# Altium PCB PCB_UI.PcbDoc
Units mil, origin at the board's own origin, x right, y up, seen from the top; angles counter-clockwise.
Board outline 4000 x 2500 mil, 2 copper layers (Top Layer, Bottom Layer); 55 components, 74 nets, 218 pads, 32 vias.
Unrouted connection lines stored in the file: 24.
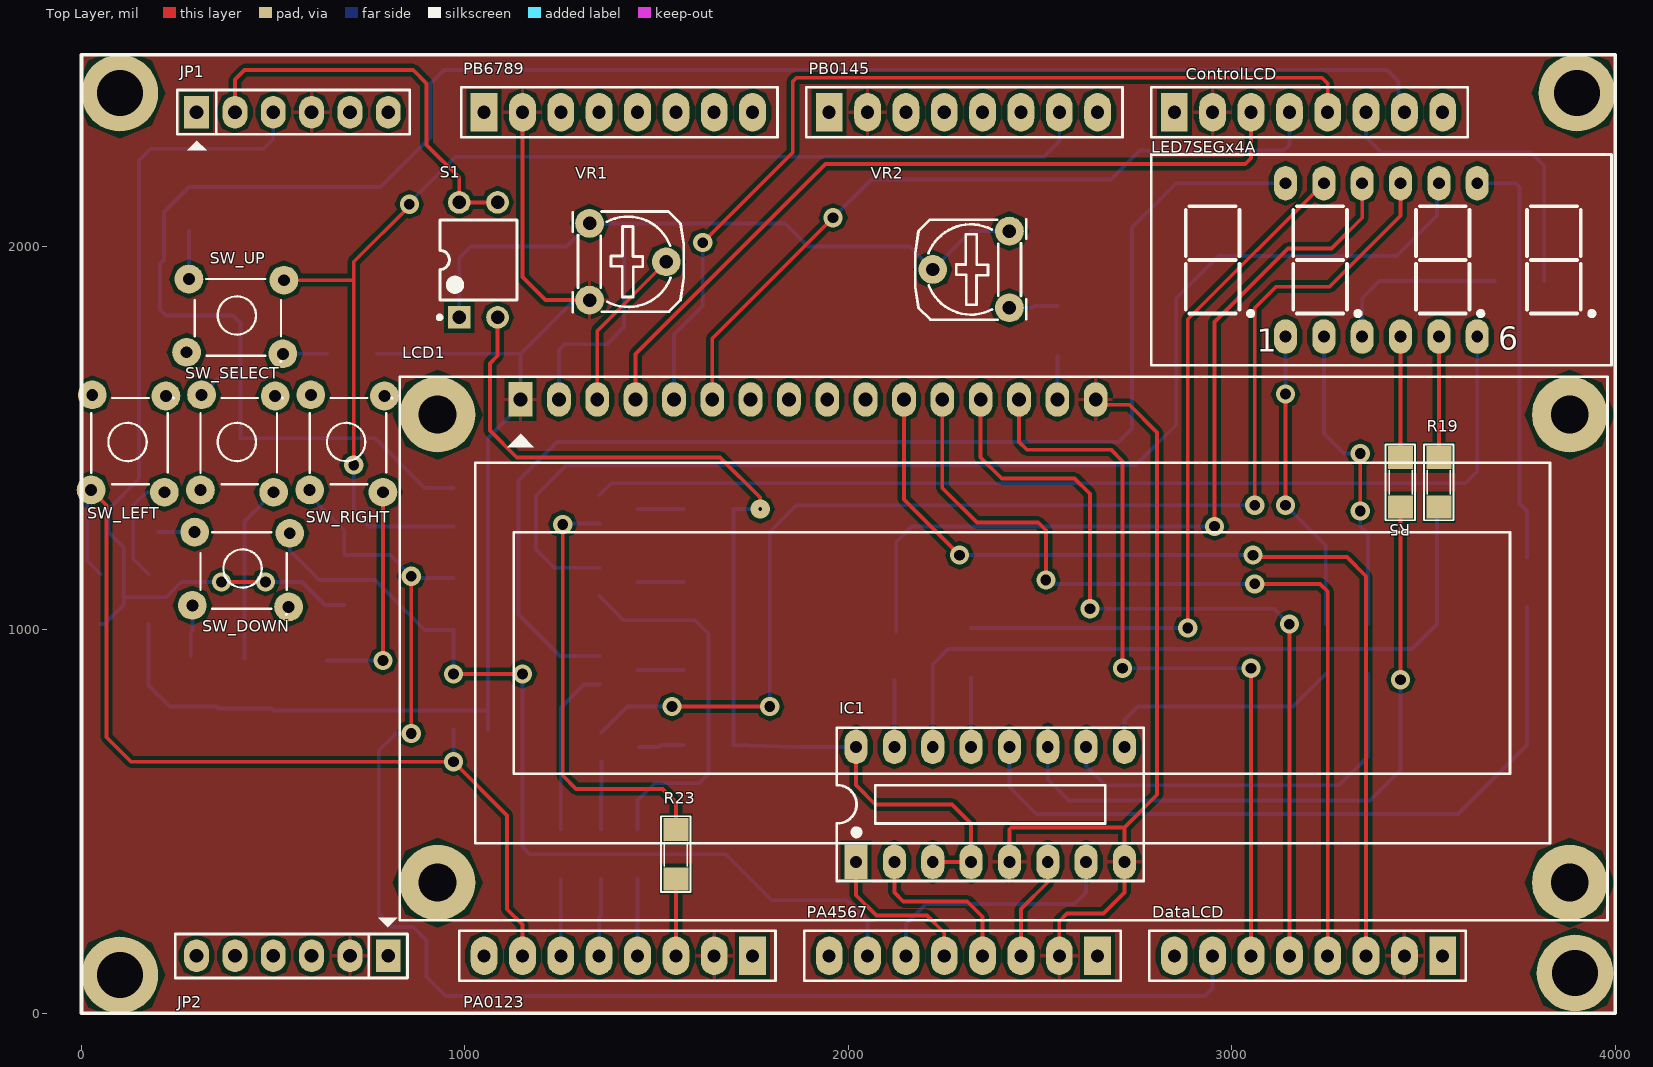
[diagram p0: Top Layer view]
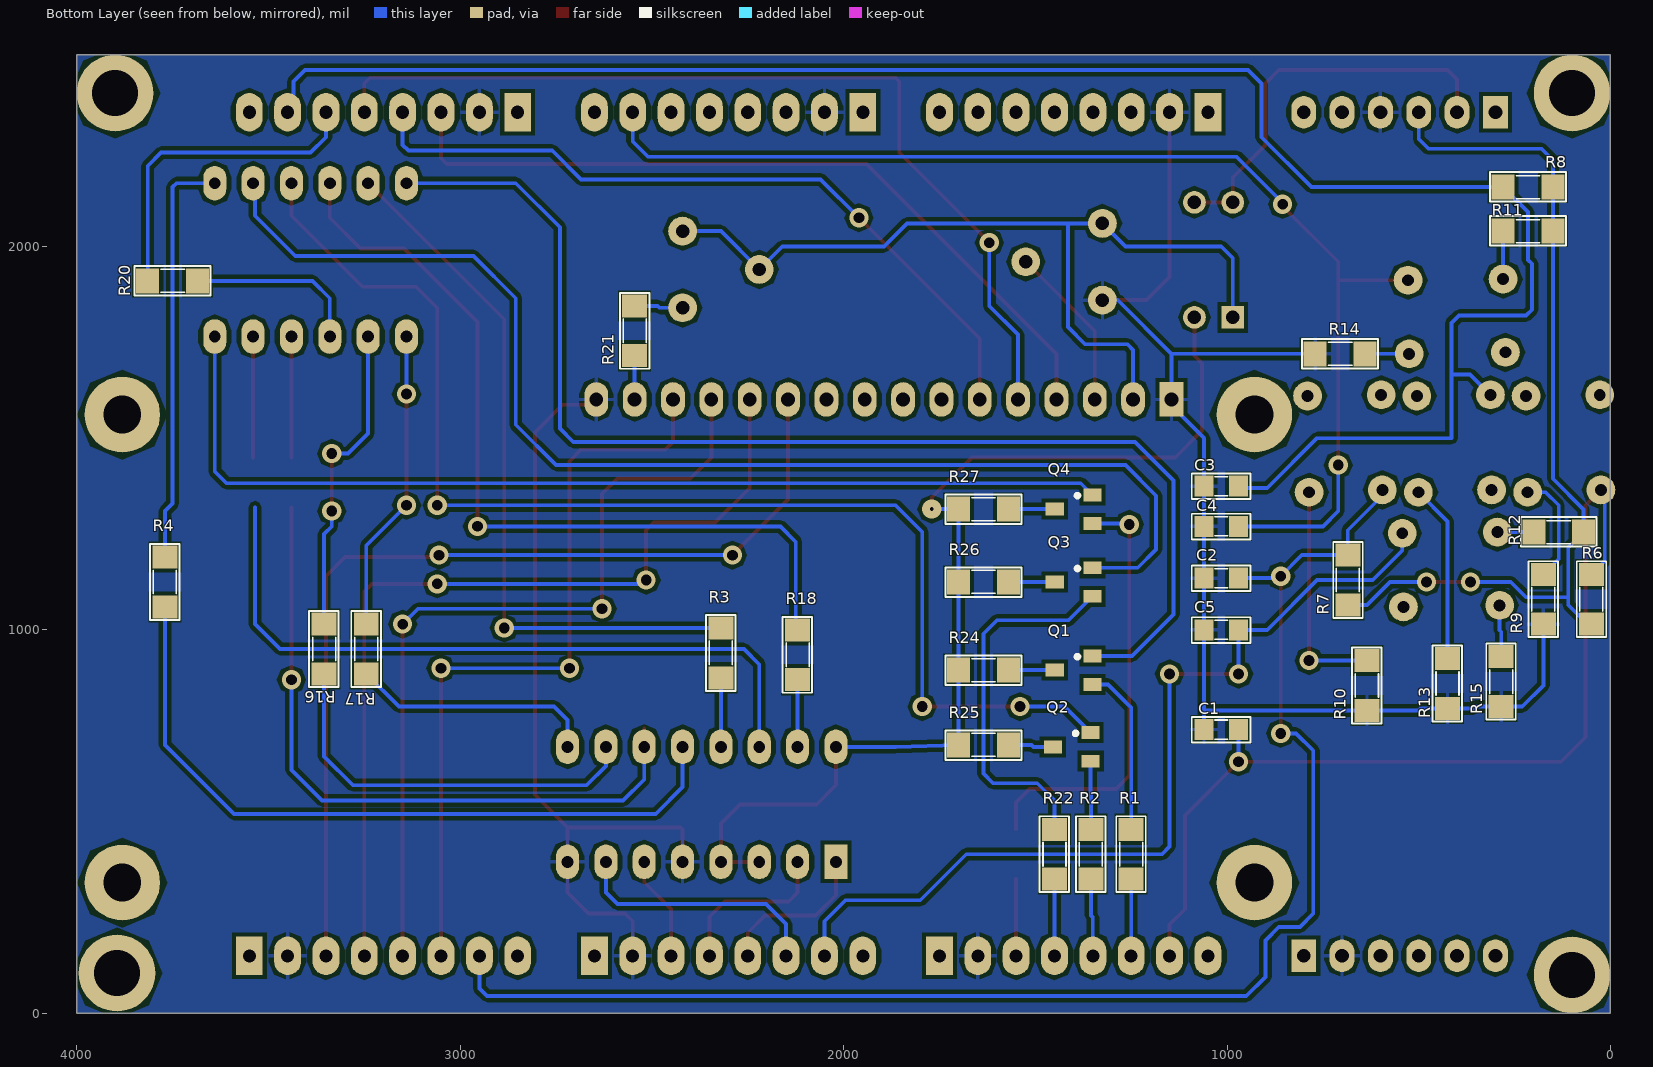
[diagram p1: Bottom Layer view, seen from below]
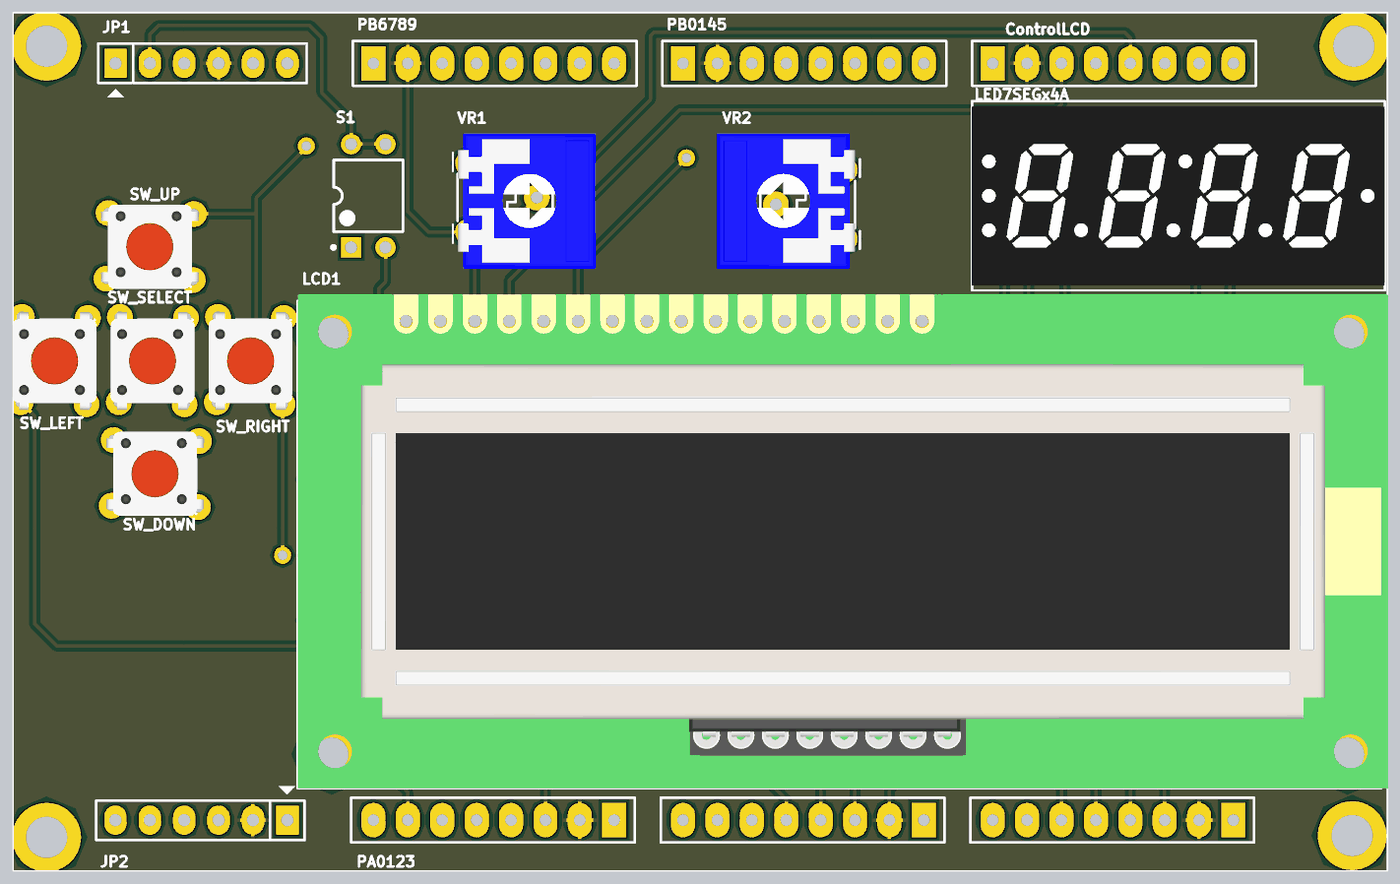
[diagram p2: 3D render of the assembled board from above, using the file's embedded part models]
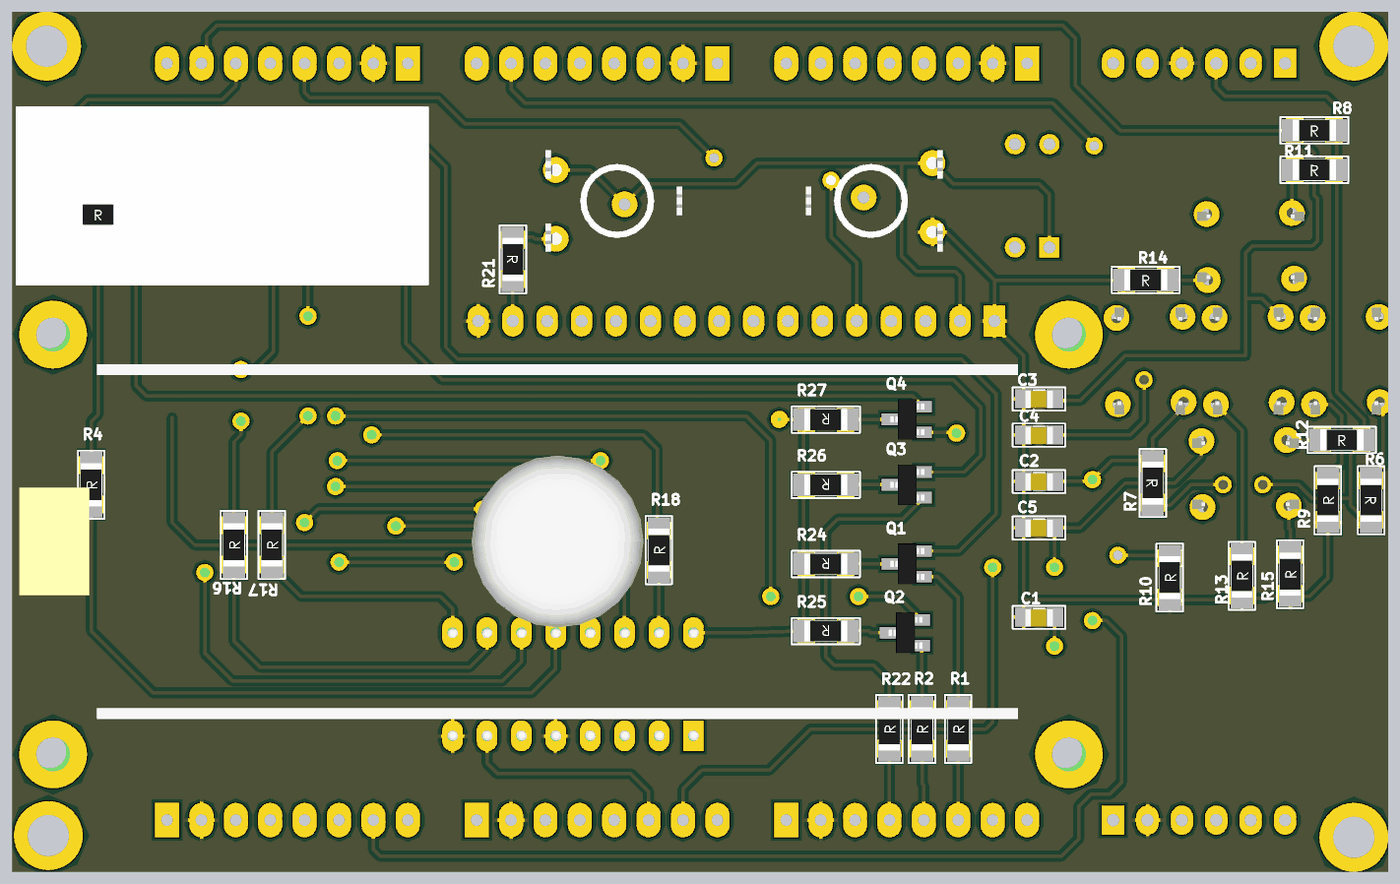
[diagram p3: 3D render of the assembled board from below, using the file's embedded part models]

## Layer stack, top to bottom
Top Layer: signal copper 1.4
Dielectric: dielectric 12.6, FR-4, Dk 4.8
Bottom Layer: signal copper 1.4

## Board outline
0,0 0,2500 4000,2500 4000,0

## Design rules (kind name [scope] priority, off if disabled: settings)
Clearance [All] p1: gap=10
PolygonConnect [All] p1: connectstyle=Relief reliefconductorwidth=10 reliefentries=4 polygonreliefangle="90 Angle"
RoomDefinition UI_Sch [InComponentClass('UI_Sch')] p1: confinementstyle=ConfineIn formatcopy=TRUE lockcomponents=FALSE outline -2090,-1885 -90,-1885 -90,-885 -2090,-885
RoomDefinition U_LED7SEG [InComponentClass('U_LED7SEG')] p2: confinementstyle=ConfineIn formatcopy=TRUE lockcomponents=FALSE outline -2090,-1885 -90,-1885 -90,-885 -2090,-885
RoomDefinition U_LCD [InComponentClass('U_LCD')] p3: confinementstyle=ConfineIn formatcopy=TRUE lockcomponents=FALSE outline -2090,-1885 -90,-1885 -90,-885 -2090,-885
RoomDefinition U_Button [InComponentClass('U_Button')] p4: confinementstyle=ConfineIn formatcopy=TRUE lockcomponents=FALSE outline -2090,-1885 -90,-1885 -90,-885 -2090,-885
RoutingVias [All] p1: holewidth=28 width=50 viastyle="Through Hole" minholewidth=28 minwidth=50 maxholewidth=28 maxwidth=50
SilkscreenOverComponentPads [All] p1: minsilkscreentomaskgap=10
SolderMaskExpansion [All] p1: expansion=4
Width [All] p1: maxlimit=10 minlimit=10 preferedwidth=10
27 further rules are at their usual default settings.

## Classes and differential pairs
component class U_LED7SEG: IC1 LED7SEGx4A Q1 Q2 Q3 Q4 R1 R2 R3 R4 R5 R16 R17 R18 R19 R20 R22 R23 R24 R25 R26 R27
component class U_LCD: LCD1 R21 VR1 VR2
component class UI_Sch: ControlLCD DataLCD DS1 JP1 JP2 PA0123 PA4567 PB0145 PB6789 S1
component class U_Button: C1 C2 C3 C4 C5 R6 R7 R8 R9 R10 R11 R12 R13 R14 R15 SW_DOWN SW_LEFT SW_RIGHT SW_SELECT SW_UP

## Components (designator, comment, footprint, x,y, rotation, side; value= is the part's Value field where it differs from the comment)
C1 "0.1u/104" SM-0805 1015,740 r180 bottom
C2 "0.1u/104" SM-0805 1015,1135 r180 bottom
C3 "0.1u/104" SM-0805 1015,1375 r180 bottom
C4 "0.1u/104" SM-0805 1015,1270 r180 bottom
C5 "0.1u/104" SM-0805 1015,1000 r180 bottom
ControlLCD "HD8" HED8 2850,2350 r0 top
DataLCD "HD8" HED8 3550,150 r180 top
IC1 "7447" DIP16/W0.3 2020,395 r0 top
JP1 "JP6 PIN" JP6 300,2350 r0 top
JP2 "JP6 PIN" JP6 800,150 r180 top
LCD1 "LCD 16x2A" LCD16X2 830,1660 r0 top
LED7SEGx4A "LED7SEGx4A" LED7SEGx4A 3140,1765 r0 top
PA0123 "" HED8 1750,150 r180 top
PA4567 "" HED8 2650,150 r180 top
PB0145 "HD8" HED8 1950,2350 r0 top
PB6789 "" HED8 1050,2350 r0 top
Q1 "C1815" SOT23B 1400,895 r90 bottom
Q2 "C1815" SOT23B 1405,695 r90 bottom
Q3 "C1815" SOT23B 1400,1125 r90 bottom
Q4 "C1815" SOT23B 1400,1315 r90 bottom
R1 "4K7" SM-1206 1250,415 r90 bottom
R2 "4K7" SM-1206 1355,415 r90 bottom
R3 "1K" SM-1206 2320,940 r90 bottom
R4 "1K" SM-1206 3770,1125 r90 bottom
R5 "1K" SM-1206 3440,1385 r90 top
R6 "10k" SM-1206 50,1080 r270 bottom
R7 "10k" SM-1206 685,1130 r270 bottom
R8 "10k" SM-1206 215,2155 r180 bottom
R9 "1k" SM-1206 175,1080 r90 bottom
R10 "1k" SM-1206 635,855 r90 bottom
R11 "10k" SM-1206 215,2040 r180 bottom
R12 "10k" SM-1206 135,1255 r180 bottom
R13 "1k" SM-1206 425,860 r90 bottom
R14 "1k" SM-1206 705,1720 r180 bottom
R15 "1k" SM-1206 285,865 r90 bottom
R16 "1K" SM-1206 3355,950 r90 bottom
R17 "1K" SM-1206 3245,950 r90 bottom
R18 "1K" SM-1206 2120,935 r90 bottom
R19 "1K" SM-1206 3540,1385 r90 top
R20 "1K" SM-1206 3750,1910 r180 bottom
R21 "100" SM-1206 2545,1780 r270 bottom
R22 "4K7" SM-1206 1450,415 r90 bottom
R23 "4K7" SM-1206 1550,415 r90 top
R24 "1k" SM-1206 1635,895 r0 bottom
R25 "1k" SM-1206 1635,700 r0 bottom
R26 "1k" SM-1206 1635,1125 r0 bottom
R27 "1k" SM-1206 1635,1315 r0 bottom
S1 "SW DIP-2" DIP-4 1035,1965 r90 top
SW_DOWN "SW" SW4 295,1255 r0 top
SW_LEFT "SW" SW4 25,1365 r90 top
SW_RIGHT "SW" SW4 595,1365 r90 top
SW_SELECT "SW" SW4 310,1365 r90 top
SW_UP "SW" SW4 280,1915 r0 top
VR1 "10K" VR 1325,2060 r270 top
VR2 "1K" VR 2420,1840 r90 top

## Footprints (in the part's own frame and the unit in brackets; to place one, negate y for a bottom-side part, rotate by r counter-clockwise, add the part's x,y. Pads: shape width x height; smd on the part's side, far side on the other; paste and mask are expansions set on the pad)
DIP16/W0.3 [mil] "16 PIN, W 300mil, Pin to pin 100mil"
  rect 60x90 hole 31: 1(0,0)
  oval 60x90 hole 31: 2(100,0) 3(200,0) 4(300,0) 5(400,0) 6(500,0) 7(600,0) 8(700,0) 9(700,300) 10(600,300) 11(500,300) 12(400,300) 13(300,300) 14(200,300) 15(100,300) 16(0,300)
  silkscreen extent -50,-50 750,350, body extent -52,-57 752,356, height 299
DIP-4 [mm] "DIP; 4 Leads; Row Spacing 7.62 mm; Pitch 2.54 mm"
  rect 1.5x1.5 hole 0.9: 1(-3.81,1.27)
  round 1.5 hole 0.9: 2(-3.81,-1.27) 3(3.81,-1.27) 4(3.81,1.27)
  silkscreen extent -3.93,-2.55 2.65,2.69, body extent -3.15,-2.5 3.15,2.5, height 5.6
HED8 [mil] "CON8"
  rect 70x100 hole 34: 1(0,0)
  oval 70x100 hole 34: 2(100,0) 3(200,0) 4(300,0) 5(400,0) 6(500,0) 7(600,0) 8(700,0)
  silkscreen extent -60,-65 765,65
JP6 [mil] "JP6"
  rect 65x85 hole 36: 1(0,0)
  oval 65x85 hole 36: 2(100,0) 3(200,0) 4(300,0) 5(400,0) 6(500,0)
  silkscreen extent -50,-99 556,58
LCD16X2 [mil] "LCD dipslay 16x2, 16 pin"
  rect 62x90 hole 36: 1(314.96,-59.06)
  oval 62x90 hole 36: 2(414.96,-59.06) 3(514.96,-59.06) 4(614.96,-59.06) 5(714.96,-59.06) 6(814.96,-59.06) 7(914.96,-59.06) 8(1014.96,-59.06) 9(1114.96,-59.06) 10(1214.96,-59.06) 11(1314.96,-59.06) 12(1414.96,-59.06) 13(1514.96,-59.06) 14(1614.96,-59.06) 15(1714.96,-59.06) 16(1814.96,-59.06)
  round 196.85 hole 98.43: "Hole 0"(98.43,-98.43) "Hole 0"(3051.18,-98.43) "Hole 1"(98.43,-1318.9) "Hole 1"(3051.18,-1318.9)
  silkscreen extent 0,-1417 3150,0, body extent 0,-1419 3169,19, height 414
LED7SEGx4A [mil] "DIP 12 Leads; Body 32x 15 mm; Pitch 0.5 mm"
  oval 60x90 hole 31: 1(0,0) 2(100,0) 3(200,0) 4(300,0) 5(400,0) 6(500,0) 7(500,400) 8(400,400) 9(300,400) 10(200,400) 11(100,400) 12(0,400)
  silkscreen extent -350,-75 850,475, body extent -351,-60 850,460, height 238
SM-0805 [mil] "Compoment SMD 80x50mil"
  rect 50x55 smd: 1(-45,0) 2(45,0)
  silkscreen extent -77,-34 76,33, body extent -40,-27 40,23, height 24
SM-1206 [mil] "Compoment SMD 120x60mil"
  rect 60x65 smd: 1(-65,0) 2(65,0)
  silkscreen extent -99,-38 99,39, body extent -83,-35 83,36, height 25
SOT23B [mm] "SOT 23B"
  rect 0.85x1.2 smd: 1(0.94,-1.245) 2(0,1.25) 3(-0.95,-1.25)
  silkscreen extent 0.77,-0.38 1.02,-0.13, body extent -1.5,-1.3 1.5,1.2, height 1.06
SW4 [mil] "SW button 4pin, 250 x250 mil"
  round 75 hole 31: 1(0,0) 2(245,-195) 3(248,-3) 4(-6,-191)
  silkscreen extent 15,-215 240,0, body extent -36,-220 276,24, height 276
VR [mil] "Resistor Variable"
  round 75 hole 35: 1(0,0) 2(100,200) 3(200,0)
  silkscreen extent -31,-44 231,246, body extent -87,-30 307,372, height 165

## Part data
C1 C2 C3 C4 C5: library part CM, "Cap SMD"
ControlLCD DataLCD PA0123 PA4567 PB0145 PB6789: library part Hed8, "Hedear 8"
IC1: "BCD to 7-Segment Decoder/Driver"
JP1 JP2: library part JP6
LCD1: library part LCD16x2A, "LCD dipslay 16 char, 2 line"
LED7SEGx4A: "0.36''"
Q1 Q2 Q3 Q4: "NPN 600mW, ECB"
R1 R2 R3 R4 R5 R6 R7 R8 R9 R10 R11 R12 R13 R14 R15 R16 R17 R18 R19 R20 R21 R22 R23 R24 R25 R26 R27: library part R, "Resistor 1/4W"
S1: "DIP Switch, 2 Position, SPST"
SW_DOWN SW_LEFT SW_RIGHT SW_SELECT SW_UP: library part SW4, "Switch button 4 pin"
VR1 VR2: library part VR, "Var Resistor"

## Free pads (board coordinates)
  round 200 hole 120: 1(100,100) 2(3895,105) 3(3900,2400) 4(100,2400)

## Via types
v1: diameter 50, hole 28, Top Layer to Bottom Layer, 31 vias
v2: diameter 50, hole 10, Top Layer to Bottom Layer, 1 vias

## Nets (pads, with @x,y where several pads share a name; then routed paths per layer and width w, separated by ;. In a path a pad name is that pad's centre, name@x,y a point inside that pad or via, vN(x,y) a via of type N, cw(c..) or ccw(c..) an arc to the next point about the centre after c; other vN are vias at no path point)
3V3: ControlLCD.1 DataLCD.1 JP1.3 JP2.1 PA0123.1 PA4567.1 PB0145.1 PB6789.1 R6.2 R7.2 R8.2 R11.2 R12.2 | length 2349.6
  Top Layer w10: v1(365,1125) v1(480,1125)
  Bottom Layer w10: R6.2 60,1015 110,1065 110,1085 ; v1(365,1125) 260,1125 220,1085 110,1085 ; v1(480,1125) 575,1125 635,1065 R7.2 ; JP1.3 500,2280 475,2255 180,2255 150,2225 R8.2 R11.2 150,1394 70,1314 R12.2 110,1215 110,1085
5V: ControlLCD.8 DataLCD.8 JP1.2 PA0123.8 PA4567.8 PB0145.8 PB6789.8 S1.3 S1.4 | length 1055.1
  Top Layer w10: JP1.2 400,2435 425,2460 865,2460 900,2425 900,2265 985,2180 S1.4 S1.3
GND: C1.1 C2.1 C3.1 C4.1 C5.1 ControlLCD.2 DataLCD.2 IC1.5 IC1.8 JP1.4 JP2.2 LCD1.1 LCD1.16 PA0123.2 PA4567.2 PB0145.2 PB6789.2 R9.1 R10.1 R13.1 R14.1 R15.1 VR1.3 | length 5447.1
  Top Layer w10: PB6789.2 1150,1920 1210,1860 VR1.3 ; IC1.5 2420,480 2425,485 2720,485 ; PA4567.2 2550,240 2570,260 2665,260 2720,315 IC1.8 2720,485 ; LCD1.16 2644.96,1587 2733,1587 2805,1515 2805,570 2720,485
  Bottom Layer w10: R9.1 175,855 230,800 R15.1 352,800 357,795 R13.1 495,795 500,790 R10.1 1060,790 ; R14.1 1144.96,1720 ; C1.1 1060,790 ; VR1.3 1285,1860 1144.96,1719.96 LCD1.1 1144.96,1584.96 1060,1500 C3.1 C4.1 C2.1 C5.1 1060,790
LCD: LCD1.2 S1.1 VR1.1 VR2.2 VR2.3 | length 2316.4
  Bottom Layer w10: S1.1 985,1970 1015,2000 1265,2000 VR1.1 VR1.1@1335,2070 ; LCD1.2@1245,1600.98 1245,1730 1260,1745 1370,1745 1415,1790 1415,2060 ; VR1.1@1335,2060 1415,2060 ; VR2.3 2320,2040 VR2.2 2160,2000 1895,2000 1835,2060 1415,2060
LED7SEG: IC1.3 IC1.4 IC1.16 R24.2 R25.2 R26.2 R27.2 S1.2 | length 2757.3
  Top Layer w10: S1.2 1085,1715 1065,1695 1065,1520 1135,1450 1665,1450 1770,1345 v2(1770,1315) ; IC1.16 2020,595 2070,545 2270,545 2320,495 IC1.4 IC1.3
  Bottom Layer w10: v2(1770,1315) R27.2 R26.2 R24.2 R25.2 1865,695 IC1.16
NetC1_2: C1.2 PA0123.7 R6.1 SW_LEFT.1 SW_LEFT.3 | length 2496.3
  Top Layer w10: SW_LEFT.1 65,1325 65,720 129,656 v1(970,656) 1110,516 1110,271.5 1150,231.5 PA0123.7
  Bottom Layer w10: SW_LEFT.1 15,1355 15,1180 R6.1 ; v1(970,656) C1.2
NetC2_2: C2.2 DataLCD.7 R7.1 SW_RIGHT.1 SW_RIGHT.3 | length 3868.8
  Top Layer w10: v1(860,730) v1(860,1140)
  Bottom Layer w10: SW_RIGHT.1 595,1350 685,1260 R7.1 805,1195 v1(860,1140) 865,1135 C2.2 ; v1(860,730) 820,730 775,685 775,260 810,225 865,225 900,190 900,95 950,45 2930,45 2950,65 DataLCD.7
NetC3_2: C3.2 ControlLCD.7 R8.1 SW_SELECT.1 SW_SELECT.3 | length 5070.3
  Bottom Layer w10: SW_SELECT.3 366,1666 415,1666 ; C3.2@970,1370 895,1370 765,1500 415,1500 415,1666 ; ControlLCD.7 3435,2365 3435,2430 3405,2460 945,2460 910,2425 910,2285 780,2155 R8.1 215,2090 215,1965 205,1955 205,1835 220,1820 395,1820 415,1800 415,1666
NetC4_2: C4.2 PB0145.7 R11.1 SW_UP.1 SW_UP.3 | length 3284.4
  Top Layer w10: SW_UP.3 707,1912 ; v1(710,1430) 710,1960 v1@857.5,2107.5 ; v1(855,2110) v1@855,2114
  Bottom Layer w10: SW_UP.1 R11.1 ; v1(710,1430) 710,1310 750,1270 C4.2 ; v1(855,2110) 855,2114 975,2234 2510,2234 2550,2274 PB0145.7
NetC5_2: C5.2 PA4567.7 R12.1 SW_DOWN.1 SW_DOWN.3 | length 2478.5
  Top Layer w10: v1(970,885) v1(1150,885)
  Bottom Layer w10: R12.1 SW_DOWN.1 ; SW_DOWN.3 543,1207 620,1130 765,1130 895,1000 C5.2 v1(970,885) v1@970,875 ; v1(1150,885) 1150,435 1170,415 1680,415 1800,295 1995,295 2050,240 PA4567.7
NetControlLCD_3: ControlLCD.3 LCD1.4 | length 2055.3
  Top Layer w10: LCD1.4 1444.96,1719.96 1940,2215 3035,2215 3050,2230 ControlLCD.3
NetControlLCD_4: ControlLCD.4 LCD1.6 | length 1958.3
  Top Layer w10: LCD1.6 1644.96,1759.96 v1(1960,2075)
  Bottom Layer w10: v1(1960,2075) 2060,2175 2685,2175 2760,2250 3135,2250 3150,2265 ControlLCD.4
NetControlLCD_5: ControlLCD.5 LCD1.5 | length 2437.8
  Top Layer w10: v1(1620,2010) 1855,2245 1855,2430 1865,2440 3235,2440 3250,2425 ControlLCD.5
  Bottom Layer w10: LCD1.5 1545,1600.98 1545,1770 1620,1845 v1(1620,2010)
NetControlLCD_6: ControlLCD.6 R20.1 | length 861.1
  Bottom Layer w10: ControlLCD.6 3350,2285 3390,2245 3780,2245 3815,2210 R20.1
NetDataLCD_3: DataLCD.3 LCD1.11 | length 2536.7
  Top Layer w10: LCD1.11 2144.96,1340.04 v1(2290,1195) ; v1@3050,1190 3300,1190 3350,1140 DataLCD.3
  Bottom Layer w10: v1(2290,1195) v1@3050,1195
  other v1: 3055,1195
NetDataLCD_4: DataLCD.4 LCD1.12 | length 2359.8
  Top Layer w10: LCD1.12 2244.96,1370.04 2335,1280 2495,1280 2515,1260 v1(2515,1130) ; v1(3060,1120) 3230,1120 3250,1100 DataLCD.4
  Bottom Layer w10: v1@2525,1120 v1(3060,1120)
NetDataLCD_5: DataLCD.5 LCD1.13 | length 2176.9
  Top Layer w10: LCD1.13 2344.96,1450.04 2400,1395 2590,1395 2630,1355 v1(2630,1055) ; DataLCD.5 v1(3150,1015)
  Bottom Layer w10: v1(2630,1055) 3110,1055 v1(3150,1015)
NetDataLCD_6: DataLCD.6 LCD1.14 | length 2026.7
  Top Layer w10: LCD1.14 2444.96,1490.04 2465,1470 2685,1470 2715,1440 v1(2715,900) ; DataLCD.6 v1(3050,900)
  Bottom Layer w10: v1(2715,900) v1(3050,900)
NetIC1_1: IC1.1 PA4567.5 | length 417.6
  Top Layer w10: IC1.1 2020,308 2073,255 2205,255 2250,210 PA4567.5
NetIC1_2: IC1.2 PA4567.4 | length 438.1
  Top Layer w10: IC1.2 2120,315 2143,292 2310,292 2350,252 PA4567.4
NetIC1_6: IC1.6 PA4567.3 | length 274
  Top Layer w10: PA4567.3 2450,272 2520,342 IC1.6
NetIC1_7: IC1.7 PA4567.6 | length 667
  Bottom Layer w10: PA4567.6 2150,233 2202,285 2590,285 2620,315 IC1.7
NetIC1_9: IC1.9 R17.1 | length 644.7
  Bottom Layer w10: IC1.9 2720,765 2755,800 3160,800 R17.1
NetIC1_10: IC1.10 R16.1 | length 1051.8
  Bottom Layer w10: IC1.10 2620,645 2670,595 3280,595 3355,670 R16.1
NetIC1_11: IC1.11 R5.1 | length 1793.6
  Top Layer w10: IC1.11 2520,742.63 ; v1(3440,870) R5.1
  Bottom Layer w10: IC1.11 2520,610 2575,555 3360,555 3440,635 v1(3440,870)
NetIC1_12: IC1.12 R4.1 | length 1918.6
  Bottom Layer w10: IC1.12 2420,590 2490,520 3590,520 3770,700 R4.1
NetIC1_13: IC1.13 R3.1 | length 180
  Bottom Layer w10: IC1.13 R3.1
NetIC1_14: IC1.14 R19.1 | length 1878.5
  Bottom Layer w10: IC1.14 2220,910 2260,950 3470,950 3535,1015 3535,1320
NetIC1_15: IC1.15 R18.1 | length 175
  Bottom Layer w10: IC1.15 R18.1
NetJP2_3: JP2.3
NetJP2_4: JP2.4
NetJP2_5: JP2.5
NetJP2_6: JP2.6
NetLCD1_3: LCD1.3 VR1.2 | length 433.6
  Top Layer w10: LCD1.3 1344.96,1779.96 VR1.2
NetLCD1_15: LCD1.15 R21.2 | length 114.1
  Bottom Layer w10: LCD1.15 2544.96,1657 2545,1657.04 R21.2
NetLED7SEGx4A_1: LED7SEGx4A.1 R17.2 | length 803.5
  Top Layer w10: v1(3140,1325) v1(3140,1615)
  Bottom Layer w10: v1(3140,1325) 3245,1220 R17.2 ; v1@3140,1605 v1(3140,1615) LED7SEGx4A.1
NetLED7SEGx4A_2: LED7SEGx4A.2 R16.2 | length 822.5
  Top Layer w10: v1(3335,1310) v1(3335,1460)
  Bottom Layer w10: LED7SEGx4A.2 3240,1512.5 3292.5,1460 v1(3335,1460) ; v1(3335,1310) 3335,1270 3355,1250 R16.2
NetLED7SEGx4A_3: LED7SEGx4A.3 R20.2 | length 463.6
  Bottom Layer w10: LED7SEGx4A.3 3340,1865 3385,1910 R20.2
NetLED7SEGx4A_4: LED7SEGx4A.4 R5.2 | length 315
  Top Layer w10: R5.2 LED7SEGx4A.4
NetLED7SEGx4A_5: LED7SEGx4A.5 R19.2 | length 315
  Top Layer w10: R19.2 LED7SEGx4A.5
NetLED7SEGx4A_6: LED7SEGx4A.6 Q4.1 | length 2666.3
  Bottom Layer w10: Q4.1 1381.5,1382.5 3609.5,1382.5 3640,1413 LED7SEGx4A.6
NetLED7SEGx4A_7: LED7SEGx4A.7 R4.2 | length 1087.4
  Bottom Layer w10: LED7SEGx4A.7 3740,2165 3750,2155 3750,1330 3770,1310 R4.2
NetLED7SEGx4A_8: LED7SEGx4A.8 Q3.1 | length 3251.6
  Bottom Layer w10: Q3.1 1233,1162 1185,1210 1185,1350 1265,1430 2750,1430 2855,1535 2855,1865 2965,1975 3430,1975 3535,2080 LED7SEGx4A.8@3535,2160
NetLED7SEGx4A_9: LED7SEGx4A.9 Q2.1 | length 3295.6
  Top Layer w10: v1(1540,800) v1(1795,800) ; v1(3060,1325) 3060,1840 3115,1895 3255,1895 3440,2080 LED7SEGx4A.9
  Bottom Layer w10: Q2.1 1424,800 v1(1540,800) ; v1(1795,800) 1795,1255 1865,1325 v1(3060,1325)
NetLED7SEGx4A_10: LED7SEGx4A.10 R18.2 | length 2197.4
  Top Layer w10: v1@2955,1275 2955,1803.28 3146.72,1995 3260,1995 3340,2075 LED7SEGx4A.10
  Bottom Layer w10: R18.2@2125,995 2125,1230 2165,1270 v1(2955,1270)
NetLED7SEGx4A_11: LED7SEGx4A.11 R3.2 | length 1872
  Top Layer w10: v1(2885,1005) 2885,1810 LED7SEGx4A.11
  Bottom Layer w10: R3.2 v1(2885,1005)
NetLED7SEGx4A_12: LED7SEGx4A.12 Q1.1 | length 3234.3
  Bottom Layer w10: Q1.1 1248,932 1140,1040 1140,1390 1240,1490 2705,1490 2740,1525 2740,2050 2855,2165 LED7SEGx4A.12
NetPA0123_3: PA0123.3 R23.1 | length 200
  Top Layer w10: PA0123.3 R23.1
NetPA0123_4: PA0123.4 R22.1 | length 200
  Bottom Layer w10: PA0123.4 R22.1
NetPA0123_5: PA0123.5 R2.1 | length 202.1
  Bottom Layer w10: PA0123.5 1350,250 1355,255 R2.1
NetPA0123_6: PA0123.6 R1.1 | length 200
  Bottom Layer w10: PA0123.6 R1.1
NetPB0145_3: PB0145.3
NetPB0145_4: PB0145.4
NetPB0145_5: PB0145.5
NetPB0145_6: PB0145.6
NetPB6789_3: PB6789.3
NetPB6789_4: PB6789.4
NetPB6789_5: PB6789.5
NetPB6789_6: PB6789.6
NetPB6789_7: PB6789.7
NetQ1_2: Q1.2 R24.1 | length 120.8
  Bottom Layer w10: Q1.2 R24.1
NetQ1_3: Q1.3 R1.2 | length 443.2
  Bottom Layer w10: R1.2 1250,797.6 1310,857.6 Q1.3
NetQ2_2: Q2.2 R25.1 | length 117.9
  Bottom Layer w10: Q2.2 1505,695 1510,700 R25.1
NetQ2_3: Q2.3 R2.2 | length 177.9
  Bottom Layer w10: R2.2 1355,568 1355.79,568.79 Q2.3
NetQ3_2: Q3.2 R26.1 | length 120.8
  Bottom Layer w10: Q3.2 R26.1
NetQ3_3: Q3.3 R22.2 | length 978.6
  Bottom Layer w10: Q3.3 1413.39,1025 1600,1025 1635,990 1635,625 1610,600 1495,600 1450,555 R22.2
NetQ4_2: Q4.2 R27.1 | length 120.8
  Bottom Layer w10: Q4.2 R27.1
NetQ4_3: Q4.3 R23.2 | length 1142.2
  Top Layer w10: v1(1255,1275) 1255,620 1290,585 1515,585 1550,550 R23.2
  Bottom Layer w10: v1@1257.6,1277.6 Q4.3
NetR9_2: R9.2 SW_LEFT.2 SW_LEFT.4 | length 291.7
  Bottom Layer w10: R9.2 135,1185 135,1325 169,1359 SW_LEFT.4
NetR10_2: R10.2 SW_RIGHT.2 SW_RIGHT.4 | length 585
  Top Layer w10: v1(786,920) SW_RIGHT.4
  Bottom Layer w10: R10.2@640,920 v1(786,920)
NetR13_2: R13.2 SW_SELECT.2 SW_SELECT.4 | length 465.5
  Bottom Layer w10: R13.2 425,1283 SW_SELECT.4
NetR14_2: R14.2 SW_UP.2 SW_UP.4 | length 115
  Bottom Layer w10: SW_UP.2 R14.2
NetR15_2: R15.2 SW_DOWN.2 SW_DOWN.4 | length 135.7
  Bottom Layer w10: R15.2 285,995 289,999 SW_DOWN.4
NetR21_1: R21.1 VR2.1 | length 127.1
  Bottom Layer w10: VR2.1 2480,1840 2485,1845 R21.1
pads on no net: "LCD1.Hole 0" "LCD1.Hole 1" JP1.1 JP1.5 JP1.6 LCD1.7 LCD1.8 LCD1.9 LCD1.10

## Polygon pours and split planes (outlines as drawn)
GND on Bottom Layer "Bottom Layer-No Net" (solid, pour order 2): 0,0 0,2500 4000,2500 4000,0
GND on Top Layer "Bottom Layer-No Net" (solid, pour order 4): 0,0 0,2500 4000,2500 4000,0

## Silkscreen, mask and mechanical layers (free items; w line width, h text height)
Top Overlay:
  the board outline again, w10

## Text inside footprints (layer, text, board x,y; h text height)
LED7SEGx4A: Top Overlay "6" at 3695,1730 h60; Top Overlay "1" at 3065,1725 h60